# Altium PCB keyboard.PcbDoc
Units mil, origin at the board's own origin, x right, y up, seen from the top; angles counter-clockwise.
Board outline 14370.08 x 5905.51 mil, 2 copper layers (Top Layer, Bottom Layer); 132 components, 86 nets, 500 pads, 15 vias.
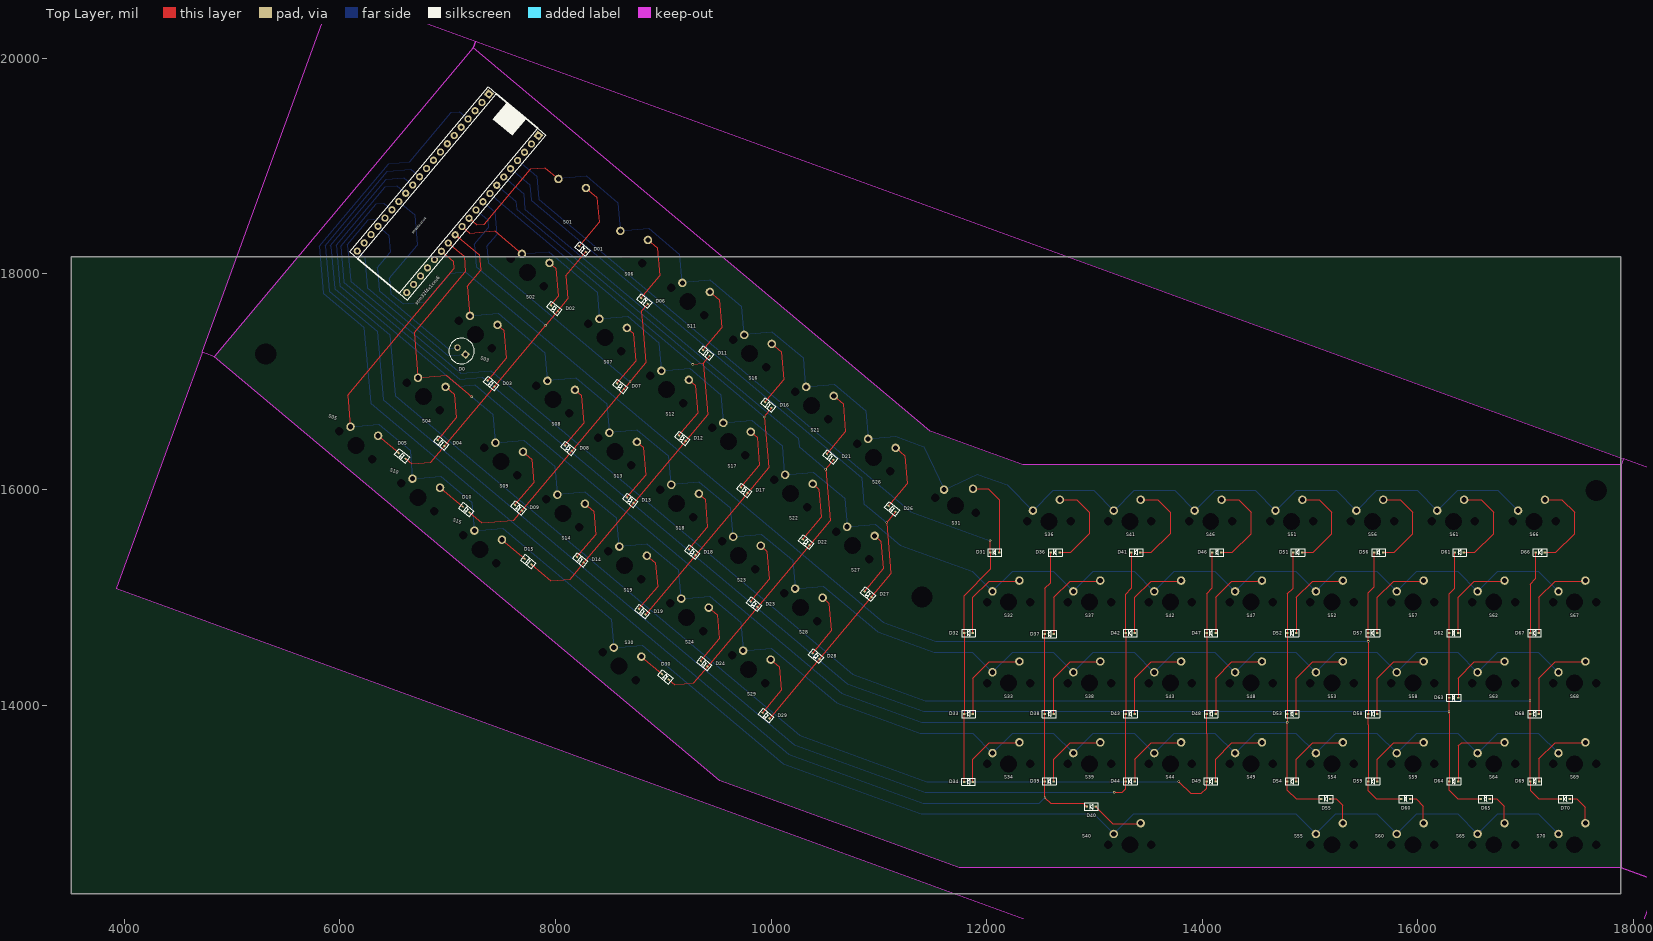
[diagram p0: Top Layer view]
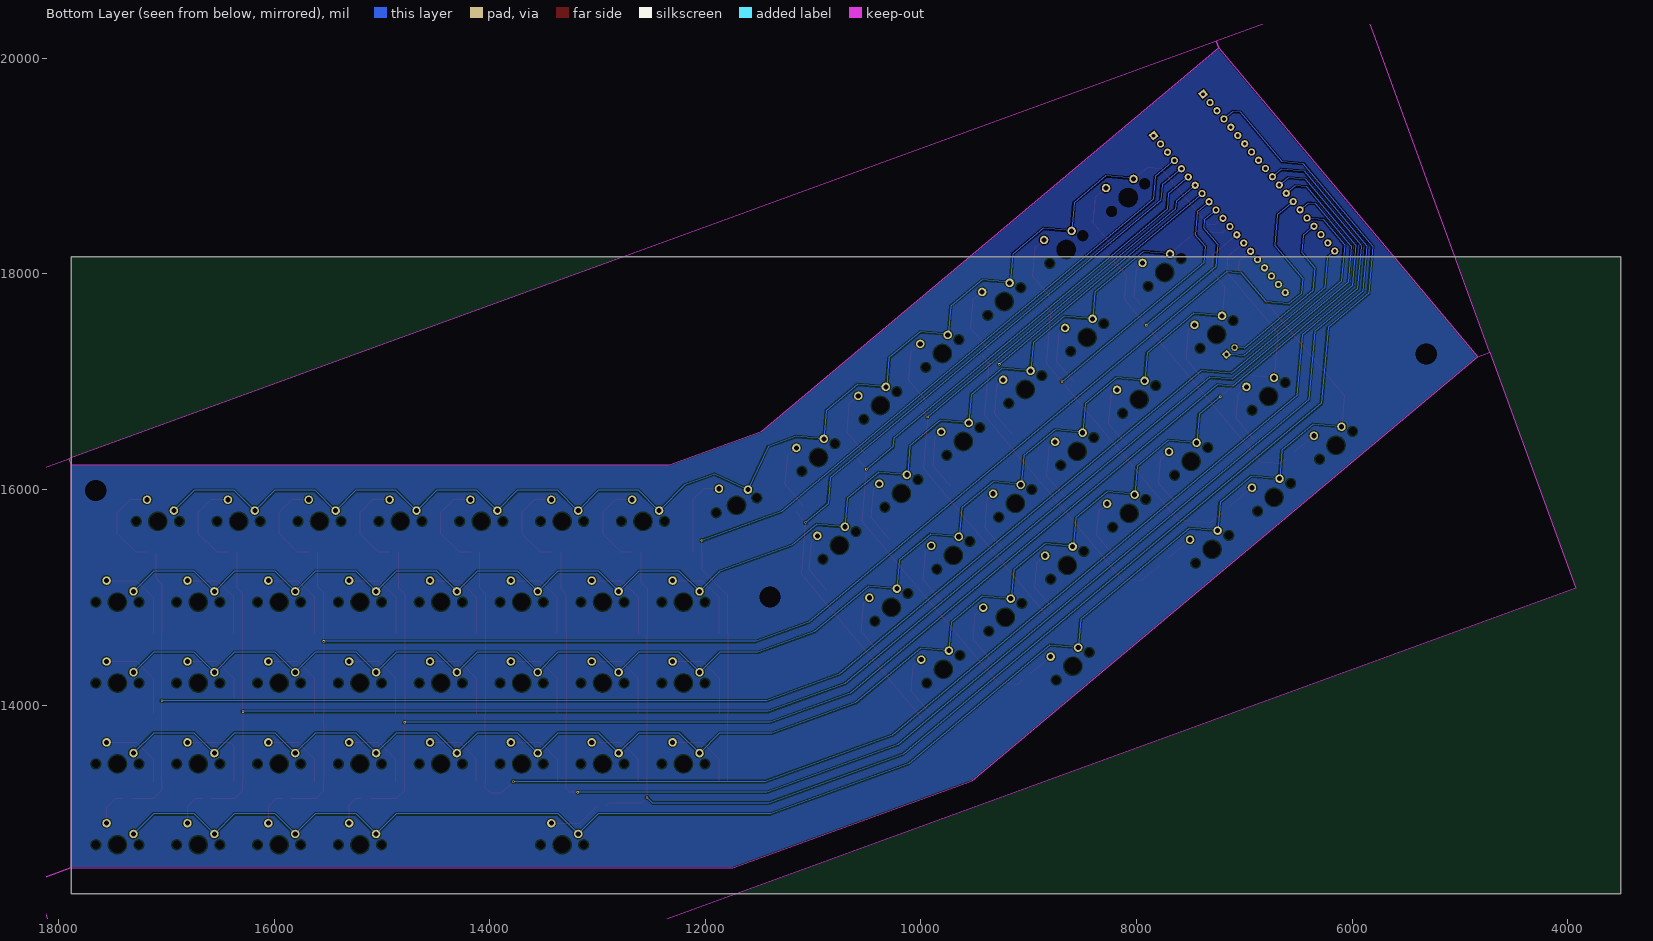
[diagram p1: Bottom Layer view, seen from below]

## Layer stack, top to bottom
Top Solder: solder mask 0.4, Solder Resist, Dk 3.5
Top Layer: signal copper 1.4
Dielectric 1: dielectric 12.6, FR-4, Dk 4.8
Bottom Layer: signal copper 1.4
Bottom Solder: solder mask 0.4, Solder Resist, Dk 3.5

## Board outline
3510,12251.02 3510,18156.54 17880.08,18156.54 17880.08,12251.02
cut-out: 4722.5,17271.58 3925.3,15081.29 17428.78,10166.43 18228.43,12363.53 17885.07,12488.5 11743.34,12488.5 9523.59,13296.42 4834.98,17230.64
cut-out: 7239.11,20095.76 4834.98,17230.64 4722.5,17271.58 5947.6,20637.5 7262.14,20159.05
cut-out: 17885.07,12488.5 18228.43,12363.53 19451.05,15722.65 17905.63,16285.14 17885.07,16228.66
cut-out: 12333.89,16228.66 11475.46,16541.1 7239.14,20095.8 7262.15,20159.04 17905.63,16285.14 17885.07,16228.66

## Design rules (kind name [scope] priority, off if disabled: settings)
Clearance [All] p1: gap=10 ignorepadtopadclearanceinfootprint=FALSE
PolygonConnect [All] p1: connectstyle=Relief reliefconductorwidth=10 reliefentries=4 polygonreliefangle="90 Angle" airgapwidth=10
RoutingVias [All] p1: holewidth=28 width=50 viastyle="Through Hole" minholewidth=28 minwidth=50 maxholewidth=28 maxwidth=50
SolderMaskExpansion [All] p1: expansion=4
UnpouredPolygon [All] p1: allowunpoured=TRUE allowshelved=TRUE
Width [All] p1: maxlimit=10 minlimit=10 preferedwidth=10
29 further rules are at their usual default settings.

## Components (designator, comment, footprint, x,y, rotation, side; value= is the part's Value field where it differs from the comment)
D0 "LED0" LED 7128.88,17284 r140 top
D01 "1N4148" SOD323 8250.27,18230.06 r140 top
D02 "1N4148" SOD323 7989.57,17679.49 r140 top
D03 "1N4148" SOD323 7402.88,16982.43 r140 top
D04 "1N4148" SOD323 6939.73,16430.47 r140 top
D05 "1N4148" SOD323 6577.29,16311.28 r140 top
D06 "1N4148" SOD323 8824.8,17747.97 r140 top
D07 "1N4148" SOD323 8601.5,16956.28 r140 top
D08 "1N4148" SOD323 8119.14,16381.42 r140 top
D09 "1N4148" SOD323 7655.99,15829.46 r140 top
D10 "1N4148" SOD323 7172.18,15812.11 r140 top
D11 "1N4148" SOD323 9399.34,17265.88 r140 top
D12 "1N4148" SOD323 9176.04,16474.19 r140 top
D13 "1N4148" SOD323 8693.67,15899.33 r140 top
D14 "1N4148" SOD323 8230.52,15347.37 r140 top
D15 "1N4148" SOD323 7746.71,15330.02 r140 top
D16 "1N4148" SOD323 9973.87,16783.79 r140 top
D17 "1N4148" SOD323 9750.57,15992.1 r140 top
D18 "1N4148" SOD323 9268.2,15417.24 r140 top
D19 "1N4148" SOD323 8805.05,14865.28 r140 top
D21 "1N4148" SOD323 10548.4,16301.7 r140 top
D22 "1N4148" SOD323 10325.1,15510.01 r140 top
D23 "1N4148" SOD323 9842.74,14935.15 r140 top
D24 "1N4148" SOD323 9379.59,14383.19 r140 top
D26 "1N4148" SOD323 11122.94,15819.61 r140 top
D27 "1N4148" SOD323 10899.64,15027.92 r140 top
D28 "1N4148" SOD323 10417.27,14453.06 r140 top
D29 "1N4148" SOD323 9954.12,13901.1 r140 top
D30 "1N4148" SOD323 9019.66,14261.77 r140 top
D31 "1N4148" SOD323 12073.47,15416.07 r0 top
D32 "1N4148" SOD323 11831.32,14667.7 r0 top
D33 "1N4148" SOD323 11831.32,13917.7 r0 top
D34 "1N4148" SOD323 11831.32,13287.7 r0 top
D36 "1N4148" SOD323 12634.6,15416.07 r0 top
D37 "1N4148" SOD323 12581.02,14659.01 r0 top
D38 "1N4148" SOD323 12581.32,13917.7 r0 top
D39 "1N4148" SOD323 12581.32,13292.26 r0 top
D40 "1N4148" SOD323 12970.37,13057.46 r0 top
D41 "1N4148" SOD323 13384.6,15416.07 r0 top
D42 "1N4148" SOD323 13331.32,14667.7 r0 top
D43 "1N4148" SOD323 13331.32,13917.7 r0 top
D44 "1N4148" SOD323 13331.32,13292.26 r0 top
D46 "1N4148" SOD323 14134.6,15416.07 r0 top
D47 "1N4148" SOD323 14081.32,14667.7 r0 top
D48 "1N4148" SOD323 14081.32,13917.7 r0 top
D49 "1N4148" SOD323 14081.32,13292.26 r0 top
D51 "1N4148" SOD323 14884.6,15416.07 r0 top
D52 "1N4148" SOD323 14831.32,14667.7 r0 top
D53 "1N4148" SOD323 14831.32,13917.7 r0 top
D54 "1N4148" SOD323 14831.32,13292.26 r0 top
D55 "1N4148" SOD323 15145.62,13129.46 r0 top
D56 "1N4148" SOD323 15634.6,15416.07 r0 top
D57 "1N4148" SOD323 15581.32,14667.7 r0 top
D58 "1N4148" SOD323 15581.32,13917.7 r0 top
D59 "1N4148" SOD323 15581.32,13292.26 r0 top
D60 "1N4148" SOD323 15885.62,13129.46 r0 top
D61 "1N4148" SOD323 16384.98,15416.07 r0 top
D62 "1N4148" SOD323 16331.32,14667.7 r0 top
D63 "1N4148" SOD323 16331.32,14067.7 r0 top
D64 "1N4148" SOD323 16331.32,13292.26 r0 top
D65 "1N4148" SOD323 16625.62,13129.46 r0 top
D66 "1N4148" SOD323 17134.6,15416.07 r0 top
D67 "1N4148" SOD323 17081.32,14667.7 r0 top
D68 "1N4148" SOD323 17081.32,13917.7 r0 top
D69 "1N4148" SOD323 17082.32,13292.26 r0 top
D70 "1N4148" SOD323 17366.62,13129.46 r0 top
S01 "MX1A" KEY 8077.98,18706.8 r320 top
S02 "MX1A" KEY 7739.53,18011.74 r320 top
S03 "MX1A" KEY 7257.44,17437.21 r320 top
S04 "MX1A" KEY 6775.35,16862.67 r320 top
S05 "MX1A" KEY 6149.62,16408.66 r320 top
S06 "MX1A" KEY 8652.52,18224.71 r320 top
S07 "MX1A" KEY 8457.69,17409.13 r320 top
S08 "MX1A" KEY 7975.6,16834.59 r320 top
S09 "MX1A" KEY 7493.51,16260.06 r320 top
S10 "MX1A" KEY 6724.15,15926.57 r320 top
S11 "MX1A" KEY 9227.05,17742.61 r320 top
S12 "MX1A" KEY 9032.23,16927.04 r320 top
S13 "MX1A" KEY 8550.14,16352.5 r320 top
S14 "MX1A" KEY 8068.05,15777.97 r320 top
S15 "MX1A" KEY 7298.69,15444.48 r320 top
S16 "MX1A" KEY 9801.58,17260.52 r320 top
S17 "MX1A" KEY 9606.76,16444.95 r320 top
S18 "MX1A" KEY 9124.67,15870.41 r320 top
S19 "MX1A" KEY 8642.58,15295.88 r320 top
S21 "MX1A" KEY 10376.12,16778.43 r320 top
S22 "MX1A" KEY 10181.29,15962.85 r320 top
S23 "MX1A" KEY 9699.2,15388.32 r320 top
S24 "MX1A" KEY 9217.11,14813.79 r320 top
S26 "MX1A" KEY 10950.65,16296.34 r320 top
S27 "MX1A" KEY 10755.83,15480.76 r320 top
S28 "MX1A" KEY 10273.74,14906.23 r320 top
S29 "MX1A" KEY 9791.65,14331.7 r320 top
S30 "MX1A" KEY 8591.39,14359.78 r320 top
S31 "MX1A" KEY 11710.7,15852.12 r340 top
S32 "MX1A" KEY 12203.47,14953.87 r0 top
S33 "MX1A" KEY 12203.46,14203.87 r0 top
S34 "MX1A" KEY 12203.47,13453.87 r0 top
S36 "MX1A" KEY 12578.47,15703.87 r0 top
S37 "MX1A" KEY 12953.46,14953.87 r0 top
S38 "MX1A" KEY 12953.46,14203.87 r0 top
S39 "MX1A" KEY 12953.46,13453.87 r0 top
S40 "MX1A" KEY 13328.47,12703.87 r0 top
S41 "MX1A" KEY 13328.47,15703.87 r0 top
S42 "MX1A" KEY 13703.47,14953.87 r0 top
S43 "MX1A" KEY 13703.47,14203.87 r0 top
S44 "MX1A" KEY 13703.47,13453.87 r0 top
S46 "MX1A" KEY 14078.47,15703.87 r0 top
S47 "MX1A" KEY 14453.46,14953.87 r0 top
S48 "MX1A" KEY 14453.46,14203.87 r0 top
S49 "MX1A" KEY 14453.46,13453.87 r0 top
S51 "MX1A" KEY 14828.47,15703.87 r0 top
S52 "MX1A" KEY 15203.47,14953.87 r0 top
S53 "MX1A" KEY 15203.46,14203.87 r0 top
S54 "MX1A" KEY 15203.47,13453.87 r0 top
S55 "MX1A" KEY 15203.47,12703.87 r0 top
S56 "MX1A" KEY 15578.46,15703.87 r0 top
S57 "MX1A" KEY 15953.47,14953.87 r0 top
S58 "MX1A" KEY 15953.47,14203.87 r0 top
S59 "MX1A" KEY 15953.47,13453.87 r0 top
S60 "MX1A" KEY 15953.47,12703.87 r0 top
S61 "MX1A" KEY 16328.46,15703.87 r0 top
S62 "MX1A" KEY 16703.46,14953.87 r0 top
S63 "MX1A" KEY 16703.46,14203.87 r0 top
S64 "MX1A" KEY 16703.46,13453.87 r0 top
S65 "MX1A" KEY 16703.47,12703.87 r0 top
S66 "MX1A" KEY 17078.47,15703.87 r0 top
S67 "MX1A" KEY 17453.46,14953.87 r0 top
S68 "MX1A" KEY 17453.46,14203.87 r0 top
S69 "MX1A" KEY 17453.46,13453.87 r0 top
S70 "MX1A" KEY 17453.46,12703.87 r0 top
stm32f4x1cxu6 "U1" STM32F4X1CXU6_CORE 6976.3,18753.72 r230 top

## Footprints (in the part's own frame and the unit in brackets; to place one, negate y for a bottom-side part, rotate by r counter-clockwise, add the part's x,y. Pads: shape width x height; smd on the part's side, far side on the other; paste and mask are expansions set on the pad)
KEY [mm]
  round 2 hole 1.2: 1(-3.8,2.54) 2(2.54,5.08)
  round 1.524 hole 2 unplated: 6(-5.08,0) 7(5.08,0)
  round 1.524 hole 4 unplated: 6(0,0)
LED [mil]
  rect 60x60 hole 39.37: 1(-49.21,0)
  round 60 hole 39.37: 2(49.21,0)
  silkscreen extent -118,-118 118,118
SOD323 [mm]
  rect 0.59x0.45 smd: 1(1.055,0) 2(-1.055,0)
  silkscreen extent -1.63,-0.86 1.63,0.86, body extent -1.3,-0.65 1.3,0.65, height 1
STM32F4X1CXU6_CORE [mm]
  rect 1.7x1.7 hole 0.9: 1(-24.384,-6.985) 40(-24.384,8.23)
  round 1.7 hole 0.9: 2(-21.844,-6.985) 3(-19.304,-6.985) 4(-16.764,-6.985) 5(-14.224,-6.985) 6(-11.684,-6.985) 7(-9.144,-6.985) 8(-6.604,-6.985) 9(-4.064,-6.985) 10(-1.524,-6.985) 11(1.016,-6.985) 12(3.556,-6.985) 13(6.096,-6.985) 14(8.636,-6.985) 15(11.176,-6.985) 16(13.716,-6.985) 17(16.256,-6.985) 18(18.796,-6.985) 19(21.336,-6.985) 20(23.876,-6.985) 21(23.876,8.23) 22(21.336,8.23) 23(18.796,8.23) 24(16.256,8.23) 25(13.716,8.23) 26(11.176,8.23) 27(8.636,8.23) 28(6.096,8.23) 29(3.556,8.23) 30(1.016,8.23) 31(-1.524,8.23) 32(-4.064,8.23) 33(-6.604,8.23) 34(-9.144,8.23) 35(-11.684,8.23) 36(-14.224,8.23) 37(-16.764,8.23) 38(-19.304,8.23) 39(-21.844,8.23)
  silkscreen extent -25.65,-8.26 25.15,9.5

## Part data
D0: "Typical INFRARED GaAs LED", LatestRevisionDate=08-Jul-2005, LatestRevisionNote="Mech Layer 1 removed.", PackageDescription="LED; 2 Leads", PackageReference=LED-0, Published=8-Jun-2000, Publisher="Altium Limited"
D01 D02 D03 D04 D05 D06 D07 D08 D09 D10 D11 D12 D13 D14 D15 D16 D17 D18 D19 D21 D22 D23 D24 D26 D27 D28 D29 D30 D31 D32 D33 D34 D36 D37 D38 D39 D40 D41 D42 D43 D44 D46 D47 D48 D49 D51 D52 D53 D54 D55 D56 D57 D58 D59 D60 D61 D62 D63 D64 D65 D66 D67 D68 D69 D70: "二极管"
S01 S02 S03 S04 S05 S06 S07 S08 S09 S10 S11 S12 S13 S14 S15 S16 S17 S18 S19 S21 S22 S23 S24 S26 S27 S28 S29 S30 S31 S32 S33 S34 S36 S37 S38 S39 S40 S41 S42 S43 S44 S46 S47 S48 S49 S51 S52 S53 S54 S55 S56 S57 S58 S59 S60 S61 S62 S63 S64 S65 S66 S67 S68 S69 S70: "按键"
stm32f4x1cxu6: library part stm32f4x1cxu6_core

## Free pads (board coordinates)
  round 60 hole 196.85 unplated: 3(5313.08,17256.85) 3(11400.99,15001.22) 3(17653.9,15989.61)

## Via types
v1: diameter 22, hole 12, Top Layer to Bottom Layer, 15 vias

## Nets (pads, with @x,y where several pads share a name; then routed paths per layer and width w, separated by ;. In a path a pad name is that pad's centre, name@x,y a point inside that pad or via, vN(x,y) a via of type N, cw(c..) or ccw(c..) an arc to the next point about the centre after c; other vN are vias at no path point)
NetD0_1: D0.1 stm32f4x1cxu6.20 | length 1516.5
  Bottom Layer w10: stm32f4x1cxu6.20 6230.45,18152.48 6255.3,17868.47 7006.26,17238.34 D0.1
NetD0_2: D0.2 stm32f4x1cxu6.17 | length 1612.2
  Bottom Layer w10: stm32f4x1cxu6.17 6453.93,18356.58 6467.68,18199.37 6345.55,18053.82 6364.04,17842.5 7001.31,17307.77 D0.2
NetD01_1: D01.1 S01.2 | length 655.2
  Top Layer w10: D01.1 8405.09,18479.18 8384.86,18710.38 S01.2
NetD01_2: D01.2 D02.2 D03.2 D04.2 D05.2 stm32f4x1cxu6.31 | length 4202.6
  Top Layer w10: D05.2 6666.5,16236.42 6844.18,16251.97 D04.2 D03.2 7911.07,17523.44 v1@7917.5,17531.1 ; v1@7917.07,17530.59 8020.34,17653.67 8115.98,17767.65 8097.15,17982.96 D01.2
  Bottom Layer w10: stm32f4x1cxu6.31 7371.17,18500.71 7377.53,18428.03 7248.97,18274.82 7267.46,18063.5 v1(7910.93,17523.56)
NetD02_1: D02.1 S02.2 | length 445.7
  Top Layer w10: S02.2@7946.6,18099.06 8004.52,18050.47 8027.21,17791.09 D02.1@7956.71,17707.07
NetD03_1: D03.1 S03.2 | length 606.3
  Top Layer w10: D03.1 7544.84,17216.23 7522.15,17475.6 S03.2@7464.24,17524.2
NetD04_1: D04.1 S04.2 | length 594.3
  Top Layer w10: D04.1 7081.7,16664.27 7062.58,16882.73 S04.2@6982.42,16950
NetD05_1: D05.1 S05.2 | length 248.7
  Top Layer w10: S05.2@6354.98,16497.82 D05.1
NetD06_1: D06.1 S06.2 | length 643.5
  Top Layer w10: D06.1 8966.76,17981.77 8944.07,18241.14 S06.2
NetD06_2: D06.2 D07.2 D08.2 D09.2 D10.2 stm32f4x1cxu6.32 | length 5285.2
  Top Layer w10: D10.2@7203.94,15785.34 7317.53,15690.02 7615.04,15716.05 D09.2 D08.2 8566.9,16850.43 D07.2 8691.6,16999.04 8730.17,17045 8838.66,17174.3 8809.02,17513.13 8808.48,17513.59 8808.93,17514.13 8797.02,17650.24 D06.2@8855.12,17719.48
  Bottom Layer w10: stm32f4x1cxu6.32 7435.45,18577.31 7454.13,18363.75 7364.14,18256.51 7377.7,18101.53 v1(8691.46,16999.15)
NetD07_1: D07.1 S07.2 | length 606.3
  Top Layer w10: D07.1 8743.46,17190.08 8720.77,17449.46 S07.2
NetD08_1: D08.1 S08.2 | length 606.3
  Top Layer w10: D08.1 8261.1,16615.22 8238.4,16874.6 S08.2@8180.49,16923.19
NetD09_1: D09.1 S09.2 | length 594.3
  Top Layer w10: D09.1 7797.95,16063.26 7778.83,16281.73 S09.2
NetD10_1: D10.1 S10.2 | length 275.5
  Top Layer w10: S10.2@6929.28,16015.93 6929.51,16015.73 D10.1
NetD11_1: D11.1 S11.2 | length 643.5
  Top Layer w10: D11.1 9541.3,17499.68 9518.61,17759.05 S11.2
NetD11_2: D11.2 D12.2 D13.2 D14.2 D15.2 stm32f4x1cxu6.33 | length 5529.3
  Top Layer w10: D15.2@7778.47,15303.25 7957.15,15153.32 8134.96,15168.87 D14.2 D13.2 D12.2 9413.2,16692.21 9371.56,17168.15 D11.2 ; v1@9273.62,17160.11 9370.99,17168.62
  Bottom Layer w10: stm32f4x1cxu6.33@7389.31,18741.88 v1@9274.33,17160.17
  other v1: 9273.68,17159.4
NetD12_1: D12.1 S12.2 | length 606.3
  Top Layer w10: D12.1 9318,16707.99 9295.31,16967.37 S12.2
NetD13_1: D13.1 S13.2 | length 606.3
  Top Layer w10: D13.1 8835.63,16133.13 8812.94,16392.5 S13.2@8755.02,16441.1
NetD14_1: D14.1 S14.2 | length 594.3
  Top Layer w10: D14.1 8372.48,15581.17 8353.37,15799.64 S14.2
NetD15_1: D15.1 S15.2 | length 276
  Top Layer w10: S15.2 7503.81,15533.83 7504.04,15533.64 D15.1
NetD16_1: D16.1 S16.2 | length 643.5
  Top Layer w10: D16.1 10115.83,17017.59 10093.14,17276.96 S16.2
NetD16_2: D16.2 D17.2 D18.2 D19.2 stm32f4x1cxu6.34 | length 5664.5
  Top Layer w10: D19.2 D18.2 D17.2 9978.75,16199.42 v1(9937.44,16671.63) 10007.72,16755.39 D16.2@10008.15,16755.9
  Bottom Layer w10: stm32f4x1cxu6.34 7632.95,18672.67 7639.31,18599.99 v1(9937.44,16671.63)
NetD17_1: D17.1 S17.2 | length 606.3
  Top Layer w10: D17.1 9892.53,16225.9 9869.84,16485.28 S17.2
NetD18_1: D18.1 S18.2 | length 606.3
  Top Layer w10: D18.1 9410.16,15651.04 9387.47,15910.41 S18.2@9329.55,15959.01
NetD19_1: D19.1 S19.2 | length 594.3
  Top Layer w10: D19.1 8947.01,15099.08 8927.9,15317.55 S19.2
NetD21_1: D21.1 S21.2 | length 643.5
  Top Layer w10: D21.1 10690.36,16535.5 10667.67,16794.87 S21.2
NetD21_2: D21.2 D22.2 D23.2 D24.2 D30.2 stm32f4x1cxu6.35 | length 6903
  Top Layer w10: D30.2 9106.22,14189.13 9284.03,14204.69 D24.2 D23.2 D22.2 10547.48,15710.41 10505.84,16186.35 10506.41,16187.03 10528.58,16213.46 D21.2@10580.01,16274.74
  Bottom Layer w10: stm32f4x1cxu6.35 7704.89,18742.85 7717.41,18599.73 10252.25,16472.74 10259.09,16394.55 v1(10505.76,16187.58)
NetD22_1: D22.1 S22.2 | length 606.3
  Top Layer w10: D22.1 10467.06,15743.81 10444.37,16003.19 S22.2
NetD23_1: D23.1 S23.2 | length 606.3
  Top Layer w10: D23.1 9984.7,15168.95 9962,15428.32 S23.2@9904.09,15476.92
NetD24_1: D24.1 S24.2 | length 594.3
  Top Layer w10: D24.1 9521.55,14616.99 9502.43,14835.46 S24.2
NetD26_1: D26.1 S26.2 | length 643.5
  Top Layer w10: D26.1 11264.9,16053.41 11242.21,16312.78 S26.2
NetD26_2: D26.2 D27.2 D28.2 D29.2 stm32f4x1cxu6.36 | length 7253.7
  Top Layer w10: D29.2 D28.2 D27.2 11112.37,15216.83 v1(11070.73,15692.77) D26.2@11154.54,15792.65
  Bottom Layer w10: stm32f4x1cxu6.36 7763.78,18823.97 7776.3,18680.85 10840.48,16109.7 10861.6,15868.25 v1(11070.73,15692.77)
NetD27_1: D27.1 S27.2 | length 606.3
  Top Layer w10: D27.1 11041.6,15261.72 11018.9,15521.1 S27.2
NetD28_1: D28.1 S28.2 | length 606.3
  Top Layer w10: D28.1 10559.23,14686.86 10536.54,14946.23 S28.2@10478.62,14994.83
NetD29_1: D29.1 S29.2 | length 594.3
  Top Layer w10: D29.1 10096.08,14134.9 10076.97,14353.37 S29.2
NetD30_1: D30.1 S30.2 | length 249.3
  Top Layer w10: S30.2@8796.84,14448.73 D30.1
NetD31_1: D31.1 S31.2 | length 771.9
  Top Layer w10: S31.2@11873.07,16006.07 12012.47,16006.07 12115,15903.54 D31.1
NetD31_2: D31.2 D32.2 D33.2 D34.2 stm32f4x1cxu6.37 | length 8072.7
  Top Layer w10: D34.2 11789.79,13913.14 D33.2 D32.2 11789.79,15014.78 12033.47,15258.46 12033.47,15416.07 v1@12033.47,15525.81
  Bottom Layer w10: stm32f4x1cxu6.37 7824.23,18903.79 7842.91,18690.23 11294.25,15794.21 v1(12031.68,15525.81)
NetD32_1: D32.1 S32.2 | length 822.3
  Top Layer w10: D32.1 11872.86,14998.98 12024.26,15150.38 S32.2@12301.14,15150.38
NetD33_1: D33.1 S33.2 | length 822.3
  Top Layer w10: D33.1 11872.86,14248.98 12024.26,14400.38 S33.2@12301.14,14400.38
NetD34_1: D34.1 S34.2 | length 702.3
  Top Layer w10: D34.1 11872.86,13498.98 12024.26,13650.38 S34.2@12301.14,13650.38
NetD36_1: D36.1 S36.2 | length 868.3
  Top Layer w10: D36.1 12778.28,15416.07 12952.76,15590.55 12952.76,15787.4 12836.29,15903.87 S36.2
NetD36_2: D36.2 D37.2 D38.2 D39.2 D40.2 stm32f4x1cxu6.4 | length 13875.9
  Top Layer w10: D38.2@12539.64,13917.72 D38.2@12540.02,13920.01 ; D36.2@12593.07,15415.07 12593.07,15134.05 12540.02,15081.01 12540.02,14659.01 D38.2@12540.02,13920.01 ; D40.2 12896.22,13090.07 12592.32,13090.07 v1(12540.32,13142.07) 12540.02,13142.37 12540.02,13292.26 12540.02,13917.7 D38.2@12540.02,13920.01
  Bottom Layer w10: stm32f4x1cxu6.4 7108.14,19504.66 7035.46,19498.31 6649.78,19038.68 6452.55,19021.42 5809.76,18255.38 5847.97,17818.64 6223.33,17503.67 6284.96,16799.26 10164.95,13543.56 11411.82,13090.07 12488.32,13090.07 v1(12540.32,13142.07)
NetD37_1: D37.1 S37.2 | length 831
  Top Layer w10: D37.1@12622.86,14659.01 12622.86,14998.98 12774.26,15150.38 S37.2@13051.14,15150.38
NetD38_1: D38.1 S38.2 | length 822.3
  Top Layer w10: D38.1 12622.86,14248.98 12774.26,14400.38 S38.2@13051.14,14400.38
NetD39_1: D39.1 S39.2 | length 697.7
  Top Layer w10: D39.1 12622.86,13498.98 12774.26,13650.38 S39.2@13051.14,13650.38
NetD40_1: D40.1 S40.2 | length 477.9
  Top Layer w10: D40.1@13013.26,13057.46 13170.34,12900.38 S40.2@13426.14,12900.38
NetD41_1: D41.1 S41.2 | length 868.3
  Top Layer w10: D41.1 13528.28,15416.07 13702.76,15590.55 13702.76,15787.4 13586.29,15903.87 S41.2
NetD41_2: D41.2 D42.2 D43.2 D44.2 stm32f4x1cxu6.11 | length 13218.6
  Top Layer w10: v1(13182.32,13190.07) 13255.32,13190.07 13289.79,13224.54 D44.2 D43.2 D42.2 13289.79,15029.78 13343.07,15083.05 D41.2@13343.07,15415.07
  Bottom Layer w10: 5864.58,18261.59 6441.8,18949.5 6658.18,18968.43 stm32f4x1cxu6.11 ; 5866.11,18260.31 5903.09,17837.66 6347.4,17464.84 6402.86,16830.87 10215.71,13631.5 11429.44,13190.07 v1(13182.32,13190.07)
NetD42_1: D42.1 S42.2 | length 822.3
  Top Layer w10: D42.1 13372.86,14998.98 13524.26,15150.38 S42.2@13801.14,15150.38
NetD43_1: D43.1 S43.2 | length 822.3
  Top Layer w10: D43.1 13372.86,14248.98 13524.26,14400.38 S43.2@13801.14,14400.38
NetD44_1: D44.1 S44.2 | length 697.7
  Top Layer w10: D44.1 13372.86,13498.98 13524.26,13650.38 S44.2@13801.14,13650.38
NetD46_1: D46.1 S46.2 | length 870.3
  Top Layer w10: D46.1@14177.14,15414.07 14177.14,15416.07 14279.28,15416.07 14453.76,15590.55 14453.76,15787.4 14337.29,15903.87 S46.2@14179.46,15903.87
NetD46_2: D46.2 D47.2 D48.2 D49.2 stm32f4x1cxu6.12 | length 13733.4
  Top Layer w10: v1(13782.32,13290.07) 13892.32,13180.07 13992.32,13180.07 14039.79,13227.54 D49.2 14039.79,13734.01 D48.2 D47.2 14039.79,15033.78 14093.07,15087.05 D46.2 D46.2@14093.07,15417.07
  Bottom Layer w10: 5912.97,18260.15 6431.06,18877.58 6593.9,18891.83 stm32f4x1cxu6.12 ; 5916.04,18257.58 5950.55,17863.11 6463.8,17432.44 6513.1,16868.91 10267.24,13718.81 11446.06,13290.07 v1(13782.32,13290.07)
NetD47_1: D47.1 S47.2 | length 822.3
  Top Layer w10: D47.1 14122.86,14998.98 14274.26,15150.38 S47.2@14551.14,15150.38
NetD48_1: D48.1 S48.2 | length 822.3
  Top Layer w10: D48.1 14122.86,14248.98 14274.26,14400.38 S48.2@14551.14,14400.38
NetD49_1: D49.1 S49.2 | length 697.7
  Top Layer w10: D49.1 14122.86,13498.98 14274.26,13650.38 S49.2@14551.14,13650.38
NetD51_1: D51.1 S51.2 | length 868.3
  Top Layer w10: D51.1 15028.28,15416.07 15202.76,15590.55 15202.76,15787.4 15086.29,15903.87 S51.2
NetD51_2: D51.2 D52.2 D53.2 D54.2 D55.2 stm32f4x1cxu6.13 | length 14097.1
  Top Layer w10: D51.2@14843.07,15418.07 D51.2 14843.07,15084.05 14789.79,15030.78 D52.2 D53.2 14789.79,13840.07 14789.79,13776.01 D54.2 14789.79,13210.6 14870.32,13130.07 D55.2@15102.32,13130.07
  Bottom Layer w10: 5964.73,18268.94 5998.01,17888.55 7108.78,16956.51 7249.66,16968.84 10657.77,14109.09 11396.9,13840.07 v1(14789.32,13840.07) ; 5967.79,18266.37 6420.32,18805.66 6529.63,18815.22 stm32f4x1cxu6.13
NetD52_1: D52.1 S52.2 | length 822.3
  Top Layer w10: D52.1 14872.86,14998.98 15024.26,15150.38 S52.2@15301.14,15150.38
NetD53_1: D53.1 S53.2 | length 822.3
  Top Layer w10: D53.1 14872.86,14248.98 15024.26,14400.38 S53.2@15301.14,14400.38
NetD54_1: D54.1 S54.2 | length 699.9
  Top Layer w10: D54.1@14872.86,13290.07 D54.1 14872.86,13498.98 15024.26,13650.38 S54.2@15301.14,13650.38
NetD55_1: D55.1 S55.2 | length 304.1
  Top Layer w10: D55.1@15192.32,13130.07 15242.32,13130.07 15301.14,13071.25 15301.14,12903.87 S55.2@15301.14,12900.38
NetD56_1: D56.1 S56.2 | length 868.3
  Top Layer w10: D56.1 15778.28,15416.07 15952.76,15590.55 15952.76,15787.4 15836.29,15903.87 S56.2
NetD56_2: D56.2 D57.2 D58.2 D59.2 D60.2 stm32f4x1cxu6.14 | length 14028.4
  Top Layer w10: D56.2@15593.07,15417.07 D56.2 15593.07,15096.05 15539.79,15042.78 15539.79,14790.07 D57.2 15539.79,14590.07 D58.2 15539.79,13819.01 D59.2 15539.79,13202.6 15612.32,13130.07 D60.2@15842.32,13130.07
  Bottom Layer w10: stm32f4x1cxu6.14 6692.73,18547.83 6717.57,18263.82 6460.46,17957.4 6472.79,17816.52 6587.69,17720.1 6799.02,17738.59 7023.99,18006.71 7164.88,18019.03 11038.55,14768.64 11529.14,14590.07 v1(15539.47,14590.07)
NetD57_1: D57.1 S57.2 | length 822.3
  Top Layer w10: D57.1 15622.86,14998.98 15774.26,15150.38 S57.2@16051.14,15150.38
NetD58_1: D58.1 S58.2 | length 822.3
  Top Layer w10: D58.1 15622.86,14248.98 15774.26,14400.38 S58.2@16051.14,14400.38
NetD59_1: D59.1 S59.2 | length 699.9
  Top Layer w10: D59.1@15622.86,13290.07 15622.86,13498.98 15774.26,13650.38 S59.2@16051.14,13650.38
NetD60_1: D60.1 S60.2 | length 318.2
  Top Layer w10: D60.1@15922.32,13130.07 15927.15,13130.07 15982.32,13130.07 16051.14,13061.26 16051.14,12903.87 S60.2@16051.14,12900.38
NetD61_1: D61.1 S61.2 | length 868.3
  Top Layer w10: D61.1 16528.65,15416.07 16703.13,15590.55 16703.13,15787.4 16586.67,15903.87 S61.2@16428.84,15903.87
NetD61_2: D61.2 D62.2 D63.2 D64.2 D65.2 stm32f4x1cxu6.15 | length 15233
  Top Layer w10: D61.2@16343.44,15418.07 D61.2 16343.44,15085.43 16289.79,15031.78 16289.79,13917.7 D64.2 16289.79,13209.6 16369.32,13130.07 D65.2@16582.32,13130.07
  Bottom Layer w10: 6008.23,18258.55 6037.81,17920.43 7110.27,17020.52 7321.6,17039.01 10708.51,14197.04 11414.53,13940.07 v1@16288.32,13940.07 ; 6009.76,18257.26 6338.87,18649.48 6408.73,18655.59 stm32f4x1cxu6.15
  other v1: 16288.32,13939.07
NetD62_1: D62.1 S62.2 | length 822.3
  Top Layer w10: D62.1 16372.86,14998.98 16524.26,15150.38 S62.2@16801.14,15150.38
NetD63_1: D63.1 S63.2 | length 672.3
  Top Layer w10: D63.1 16372.86,14248.98 16524.26,14400.38 S63.2@16801.14,14400.38
NetD64_1: D64.1 S64.2 | length 771.3
  Top Layer w10: D64.1@16372.86,13290.07 D64.1 16372.86,13620.05 16404.26,13651.46 S64.2@16801.14,13651.46
NetD65_1: D65.1 S65.2 | length 318.2
  Top Layer w10: D65.1@16672.32,13130.07 16732.32,13130.07 16801.14,13061.25 16801.14,12903.87 S65.2@16801.14,12900.38
NetD66_1: D66.1 S66.2 | length 868.3
  Top Layer w10: D66.1 17278.28,15416.07 17452.76,15590.55 17452.76,15787.4 17336.29,15903.87 S66.2
NetD66_2: D66.2 D67.2 D68.2 D69.2 D70.2 stm32f4x1cxu6.16 | length 15658.1
  Top Layer w10: D66.2@17093.07,15414.07 17093.07,15175.26 17039.79,15121.98 D67.2 17039.79,14080.01 17039.79,14039.07 D68.2 17039.79,13292.26 17039.79,13209.6 17119.32,13130.07 D70.2@17322.32,13130.07
  Bottom Layer w10: stm32f4x1cxu6.16 6418.8,18516.61 6418.55,18516.58 6265.74,18503.21 6071.01,18271.14 6100.59,17933.02 7119.43,17078.11 7401.2,17102.76 10759.3,14284.98 11432.16,14040.07 v1@17039.32,14040.07
  other v1: 17039.32,14039.07
NetD67_1: D67.1 S67.2 | length 822.3
  Top Layer w10: D67.1 17122.86,14998.98 17274.26,15150.38 S67.2@17551.14,15150.38
NetD68_1: D68.1 S68.2 | length 824.6
  Top Layer w10: D68.1@17122.86,13914.22 D68.1@17122.86,13916.49 ; D68.1 17122.86,14248.98 17274.26,14400.38 S68.2@17551.14,14400.38
NetD69_1: D69.1 S69.2 | length 701
  Top Layer w10: D69.1@17122.86,13290.07 17122.86,13292.26 17122.86,13500.05 17274.26,13651.46 S69.2@17551.14,13651.46
NetD70_1: D70.1 S70.2 | length 322.3
  Top Layer w10: D70.1@17412.32,13130.07 17472.32,13130.07 17551.14,13051.26 17551.14,12903.87 S70.2@17551.14,12900.38
NetS01_1: S01.1 S06.1 S11.1 S16.1 S21.1 S26.1 S31.1 S36.1 S41.1 S46.1 S51.1 S56.1 S61.1 S66.1 stm32f4x1cxu6.30 | length 13031.4
  Top Layer w10: stm32f4x1cxu6.30 7271.02,18454.2 7339.22,18460.17 7769.89,18973.42 7902.03,18984.98 S01.1
  Bottom Layer w10: S01.1@8021.21,18884.98 8027.14,18885.5 8283.54,18907.93 8579.24,18659.81 S06.1@8601.67,18403.4 ; S06.1@8595.74,18402.89 S06.1@8601.67,18403.4 ; S21.1@10319.34,16956.61 10296.39,17218.95 10007.14,17461.66 9750.74,17439.22 9744.81,17438.7 9721.86,17701.04 9432.61,17943.75 9176.21,17921.31 9170.28,17920.8 9147.33,18183.13 8864.53,18420.43 S06.1 S06.1@8601.67,18403.4 ; S21.1 10588.13,16974.15 10877.37,16731.45 S26.1 ; S26.1@10906.77,16463.7 S26.1 ; S36.1 12191.79,16040.93 11914.45,16141.88 S31.1 11417.86,16397.11 11158.09,16491.66 S26.1 ; S36.1@12431.19,15801.54 12619.72,15990.07 12992.65,15990.07 S41.1 ; S41.1@13181.19,15801.54 13369.72,15990.07 13742.65,15990.07 S46.1 ; S46.1@13931.19,15801.54 14119.72,15990.07 14492.65,15990.07 S51.1 ; S51.1@14681.19,15801.54 14869.72,15990.07 15242.65,15990.07 S56.1 ; S56.1@15431.19,15801.54 15619.72,15990.07 15992.65,15990.07 S61.1 ; S61.1@16181.19,15801.54 16369.72,15990.07 16742.65,15990.07 S66.1
NetS02_1: S02.1 S07.1 S12.1 S17.1 S22.1 S27.1 S32.1 S37.1 S42.1 S47.1 S52.1 S57.1 S62.1 S67.1 stm32f4x1cxu6.29 | length 13228.5
  Top Layer w10: stm32f4x1cxu6.29 7206.72,18377.62 7435.23,18397.61 S02.1
  Bottom Layer w10: S02.1 7937.45,18206.23 8385.65,17830.14 S07.1@8406.85,17587.83 ; S07.1 8669.7,17604.85 8958.95,17362.14 8981.38,17105.74 S12.1 9244.24,17122.76 9533.48,16880.05 S17.1@9555.91,16623.65 ; S17.1@9570.79,16611.16 S17.1@9562.36,16618.23 ; S22.1@10124.52,16141.04 10101.57,16403.37 9818.77,16640.67 S17.1@9562.36,16618.23 ; S22.1 10393.3,16158.58 10682.55,15915.87 S27.1 ; S27.1@10700.93,15652.42 10705.56,15652.83 10968.6,15675.84 11197.05,15484.15 11867.65,15240.07 S32.1@12051.53,15056.2 ; S32.1 12240.07,15240.07 12617.65,15240.07 S37.1@12801.53,15056.2 ; S37.1 12990.07,15240.07 13367.65,15240.07 S42.1@13551.53,15056.2 ; S42.1 13740.07,15240.07 14117.65,15240.07 S47.1@14301.53,15056.2 ; S47.1 14490.07,15240.07 14867.65,15240.07 S52.1@15051.53,15056.2 ; S52.1 15240.07,15240.07 15617.65,15240.07 S57.1@15801.53,15056.2 ; S57.1 15990.07,15240.07 16367.65,15240.07 S62.1@16551.53,15056.2 ; S62.1 16740.07,15240.07 17117.65,15240.07 S67.1@17301.53,15056.2 ; S67.1@17301.53,15050.38 17301.53,15053.87 S67.1@17301.53,15056.2 ; S67.1@17301.53,15067.5 S67.1@17301.53,15056.2 ; S67.1 S67.1@17301.53,15056.2 ; S17.1@9555.92,16623.64 9559.14,16620.94 S17.1@9562.36,16618.23 ; S17.1@9555.92,16623.64 S17.1 S17.1@9562.36,16618.23
NetS03_1: S03.1 S08.1 S13.1 S18.1 S23.1 S28.1 S33.1 S38.1 S43.1 S48.1 S53.1 S58.1 S63.1 S68.1 stm32f4x1cxu6.28 | length 13985.9
  Top Layer w10: stm32f4x1cxu6.28 7293.24,18174.48 7305.76,18031.36 7183.04,17885.11 S03.1
  Bottom Layer w10: S03.1 7469.44,17632.93 7902.32,17269.7 S08.1@7924.76,17013.29 ; S08.1@7930.69,17013.81 8187.09,17036.24 8476.34,16793.54 8499.29,16531.2 8755.7,16553.63 9044.94,16310.93 S18.1@9067.89,16048.59 ; S18.1@9073.82,16049.11 9330.23,16071.54 9619.48,15828.84 S23.1@9642.43,15566.5 ; S23.1 9911.21,15584.04 10200.46,15341.33 S28.1 10485.74,15101.95 10987.77,14680.7 11511.51,14490.07 11867.65,14490.07 S33.1@12051.53,14306.2 ; S33.1 12240.07,14490.07 12617.65,14490.07 S38.1@12801.53,14306.2 ; S38.1 12990.07,14490.07 13367.65,14490.07 S43.1@13551.53,14306.2 ; S43.1 13740.06,14490.07 14117.65,14490.07 S48.1@14301.53,14306.2 ; S48.1 14490.07,14490.07 14867.65,14490.07 S53.1@15051.53,14306.2 ; S53.1 15240.07,14490.07 15617.65,14490.07 S58.1@15801.53,14306.2 ; S58.1 15990.07,14490.07 16367.65,14490.07 S63.1@16551.53,14306.2 ; S63.1 16740.07,14490.07 17117.65,14490.07 S68.1@17301.53,14306.2
NetS04_1: S04.1 S09.1 S14.1 S19.1 S24.1 S29.1 S34.1 S39.1 S44.1 S49.1 S54.1 S59.1 S64.1 S69.1 stm32f4x1cxu6.27 | length 15101.4
  Top Layer w10: S04.1@6724.49,17048.94 6689.21,17452.16 6811.36,17597.73 7164.88,18019.03 7152.35,18162.15 stm32f4x1cxu6.27 ; S04.1 6987.35,17058.39 v1(7223.68,16860.09)
  Bottom Layer w10: v1(7223.68,16860.09) 7420.23,16695.16 S09.1@7442.67,16438.76 ; S09.1@7449.12,16433.35 7705.52,16455.78 7994.77,16213.07 S14.1@8017.2,15956.67 ; S14.1 S14.1@8017.2,15956.67 ; S19.1@8585.8,15474.06 8562.85,15736.39 8273.61,15979.1 S14.1@8017.2,15956.67 ; S19.1@8591.73,15474.58 8848.14,15497.01 9137.39,15254.3 S24.1@9160.34,14991.97 ; S24.1 9429.12,15009.51 9718.37,14766.8 S29.1 10003.65,14527.42 10606.99,14021.16 11385.66,13737.75 11869.98,13737.75 S34.1 12240.07,13740.07 12617.65,13740.07 S39.1@12801.53,13556.2 ; S34.1@12053.86,13550.38 S34.1@12060.02,13550.38 ; S39.1 12990.07,13740.07 13367.65,13740.07 S44.1@13551.53,13556.2 ; S44.1 13740.07,13740.07 14117.65,13740.07 S49.1@14301.53,13556.2 ; S49.1 14490.07,13740.07 14867.65,13740.07 S54.1@15051.53,13556.2 ; S54.1 15240.06,13740.07 15617.65,13740.07 S59.1@15801.53,13556.2 ; S59.1 15990.06,13740.07 16367.65,13740.07 S64.1@16551.53,13556.2 ; S64.1 16740.07,13740.07 17117.65,13740.07 S69.1@17301.53,13556.2
NetS05_1: S05.1 S10.1 S15.1 S30.1 S40.1 S55.1 S60.1 S65.1 S70.1 stm32f4x1cxu6.26 | length 15602.4
  Top Layer w10: S05.1@6098.66,16581.96 6073.15,16873.54 6596.85,17497.66 7056.13,18045.01 7049.77,18117.69 stm32f4x1cxu6.26
  Bottom Layer w10: S05.1@6098.66,16581.96 S05.1 ; S05.1@6105.22,16581.95 6361.63,16604.38 6650.88,16361.68 S10.1 ; S10.1@6679.76,16099.86 6936.16,16122.29 7225.41,15879.59 S15.1 7510.69,15640.2 8518.11,14794.88 S30.1 8803.4,14555.5 10114.16,13455.63 11394.23,12990.07 12992.65,12990.07 S40.1 13365.07,12990.07 14867.65,12990.07 S55.1@15051.53,12806.2 ; S55.1 15240.07,12990.07 15617.65,12990.07 S60.1@15801.53,12806.2 ; S60.1 15990.07,12990.07 16367.65,12990.07 S65.1@16551.53,12806.2 ; S65.1 16740.07,12990.07 17117.65,12990.07 S70.1@17301.53,12806.2
pads on no net: S01.6 S01.7 S02.6 S02.7 S03.6 S03.7 S04.6 S04.7 S05.6 S05.7 S06.6 S06.7 S07.6 S07.7 S08.6 S08.7 S09.6 S09.7 S10.6 S10.7 S11.6 S11.7 S12.6 S12.7 S13.6 S13.7 S14.6 S14.7 S15.6 S15.7 S16.6 S16.7 S17.6 S17.7 S18.6 S18.7 S19.6 S19.7 S21.6 S21.7 S22.6 S22.7 S23.6 S23.7 S24.6 S24.7 S26.6 S26.7 S27.6 S27.7 S28.6 S28.7 S29.6 S29.7 S30.6 S30.7 S31.6 S31.7 S32.6 S32.7 S33.6 S33.7 S34.6 S34.7 S36.6 S36.7 S37.6 S37.7 S38.6 S38.7 S39.6 S39.7 S40.6 S40.7 S41.6 S41.7 S42.6 S42.7 S43.6 S43.7 S44.6 S44.7 S46.6 S46.7 S47.6 S47.7 S48.6 S48.7 S49.6 S49.7 S51.6 S51.7 S52.6 S52.7 S53.6 S53.7 S54.6 S54.7 S55.6 S55.7 S56.6 S56.7 S57.6 S57.7 S58.6 S58.7 S59.6 S59.7 S60.6 S60.7 S61.6 S61.7 S62.6 S62.7 S63.6 S63.7 S64.6 S64.7 S65.6 S65.7 S66.6 S66.7 S67.6 S67.7 S68.6 S68.7 S69.6 S69.7 S70.6 S70.7 stm32f4x1cxu6.1 stm32f4x1cxu6.2 stm32f4x1cxu6.3 stm32f4x1cxu6.5 stm32f4x1cxu6.6 stm32f4x1cxu6.7 stm32f4x1cxu6.8 stm32f4x1cxu6.9 stm32f4x1cxu6.10 stm32f4x1cxu6.18 stm32f4x1cxu6.19 stm32f4x1cxu6.21 stm32f4x1cxu6.22 stm32f4x1cxu6.23 stm32f4x1cxu6.24 stm32f4x1cxu6.25 stm32f4x1cxu6.38 stm32f4x1cxu6.39 stm32f4x1cxu6.40

## Polygon pours and split planes (outlines as drawn)
no net on Bottom Layer "Top Layer-No Net" (solid, pour order 2): 7239.11,20095.76 4834.98,17230.64 9523.59,13296.42 11743.34,12488.5 17885.07,12488.5 17885.07,16228.66 12333.89,16228.66 11475.46,16541.1

## Silkscreen, mask and mechanical layers (free items; w line width, h text height)
Mechanical 1:
  lines w10: 7239.11,20095.76 4834.98,17230.64 9523.59,13296.42 11743.34,12488.5 17885.07,12488.5 17885.07,16228.66 12333.89,16228.66 11475.46,16541.1 7239.14,20095.8
Mechanical 6:
  drawing of 771 lines, arcs and shapes, not listed
Mechanical 7:
  drawing of 1250 lines, arcs and shapes, not listed
Mechanical 9:
  lines w0.5: 355.03,101.97 ccw(c356.03,101.97) 357.03,101.97 ; 355.03,139.12 cw(c356.03,139.12) 357.03,139.12 ; 355.03,159.12 ccw(c356.03,159.12) 357.03,159.12 ; 355.03,196.27 cw(c356.03,196.27) 357.03,196.27

## Dimensions
17653.9,15989.61 to 17885.07,16228.66 on Top Layer
17653.9,15989.61 to 17885.07,16228.66 on Top Layer
13328.46,12703.87 to 11743.34,12488.5 on Top Layer
11743.34,12488.5 to 13328.46,12703.87 on Top Layer
11400.99,15001.22 to 11710.7,15852.12 on Top Layer
11743.34,12488.5 to 11400.99,15001.22 on Top Layer
4834.98,17230.64 to 5313.08,17256.85 on Top Layer
9523.59,13296.42 to 5313.08,17256.85 on Top Layer
9523.59,13296.42 to 6626.44,17754.94 on Top Layer
9523.59,13296.42 to 6626.44,17754.94 on Top Layer
8591.39,14359.78 to 9523.59,13296.42 on Top Layer
9523.59,13296.42 to 8591.39,14359.78 on Top Layer
11743.34,12488.5 to 17885.07,12488.5 on Top Layer
17885.07,12488.5 to 17885.07,16228.66 on Top Layer
12333.89,16228.66 to 17885.07,16228.66 on Top Layer
9523.59,13296.42 to 11743.34,12488.5 on Top Layer
11475.46,16541.1 to 12333.89,16228.66 on Top Layer
9523.59,13296.42 to 4834.98,17230.64 on Top Layer
4834.98,17230.64 to 7239.14,20095.8 on Top Layer
7239.11,20095.76 to 11475.46,16541.1 on Top Layer

## Text inside footprints (layer, text, board x,y; h text height)
stm32f4x1cxu6: Top Overlay "STM32F4x1CxU6" at 6688.52,18360.59 h30 r50